# EAGLE board weaver_led (EAGLE 7.4.0)
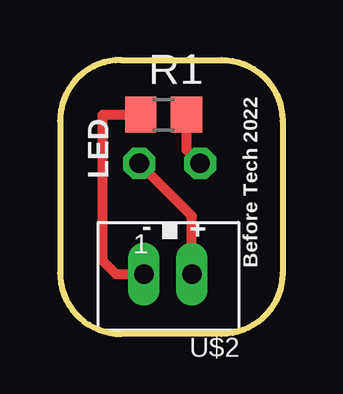
[diagram p0: board, top side]
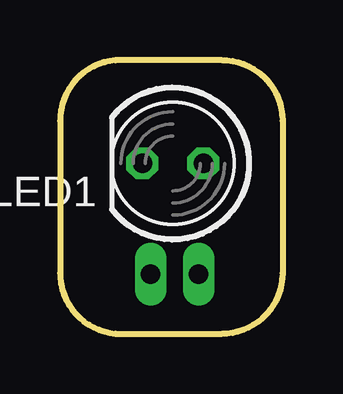
[diagram p1: board, bottom side, seen from below]

Size 9.27 x 11.43 mm. Coordinates in mm from the lower left corner, seen from the top.
Outline: 0,8.89 0,2.54 arc90 2.54,0 6.73,0 arc90 9.27,2.54 9.27,8.89 arc90 6.73,11.43 2.54,11.43 arc90 0,8.89
Copper layers (1*16): Top 0.035mm / dielectric 1.5mm / Bottom 0.035mm
Design rules "default *": minimum track width 10mil, minimum drill 20mil, track to track 8mil, track to pad 8mil, pad to pad 8mil, via to via 8mil, smd to smd 8mil, copper to edge 40mil, drill to drill 8mil, minimum pad ring 10mil, minimum via ring 8mil, stop-mask expansion 4mil, vias tented up to drill 0mil, thermal gap 10mil
Net classes: 0 default: width 0.305 mm, drill 0.508 mm, clearance 0.254 mm

## Footprints (pad centres in the part's own frame; a part is rotated, then mirrored left to right if it is on the bottom)
LED5MM = drill 0.813 octagon: A -1.27,0; K 1.27,0
R0805 = smd 1.3 x 1.5: 1 -0.95,0; 2 0.95,0
JST_B2B-PH_HEADER = drill 0.8 long: P1 1.075,0.048; P2 -0.925,0.048

## Placement (x,y rotation side)
LED1  [LED5MM]  4.57,7.11 180 bottom
R1  [R0805]  4.32,9.14 0 top
U$2  JST-PH_2-PIN_HEADER  [JST_B2B-PH_HEADER]  4.57,2.54 180 top

## Library data of the parts
LED1 = led
R1 = resistor
U$2 = SRG

## Nets
N$1: LED1.K R1.2
N$2: R1.1 U$2.P1
N$3: LED1.A U$2.P2

## Tracks (layer width: path | path; a pad name or v marks a point on that pad's centre or on a via)
N$1
  Top 0.406: R1.2 5.27,7.69 LED1.K
N$2
  Top 0.406: U$2.P1 2.33,2.49 1.78,3.05 1.78,9.14 R1.1
N$3
  Top 0.406: U$2.P2 5.5,4.92 LED1.A

## Text on the board
tPlace: Before Tech 2022 | LED | - | +